# Altium PCB VDT.PcbDoc
Units mm, origin at the board's own origin, x right, y up, seen from the top; angles counter-clockwise.
Board outline 200 x 80 mm, 2 copper layers (Top Layer, Bottom Layer); 28 components, 31 nets, 153 pads, 600 vias.
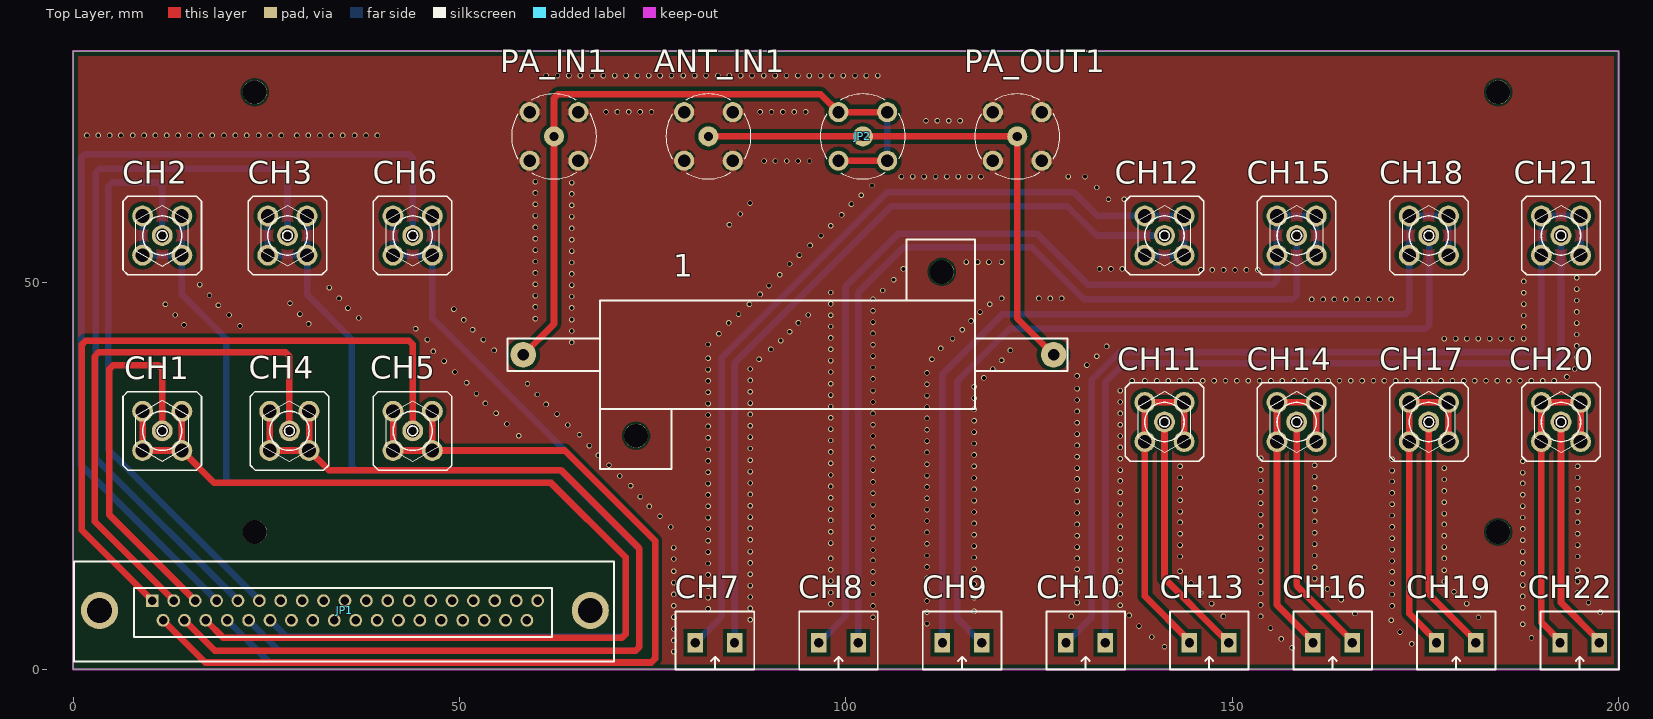
[diagram p0: Top Layer view]
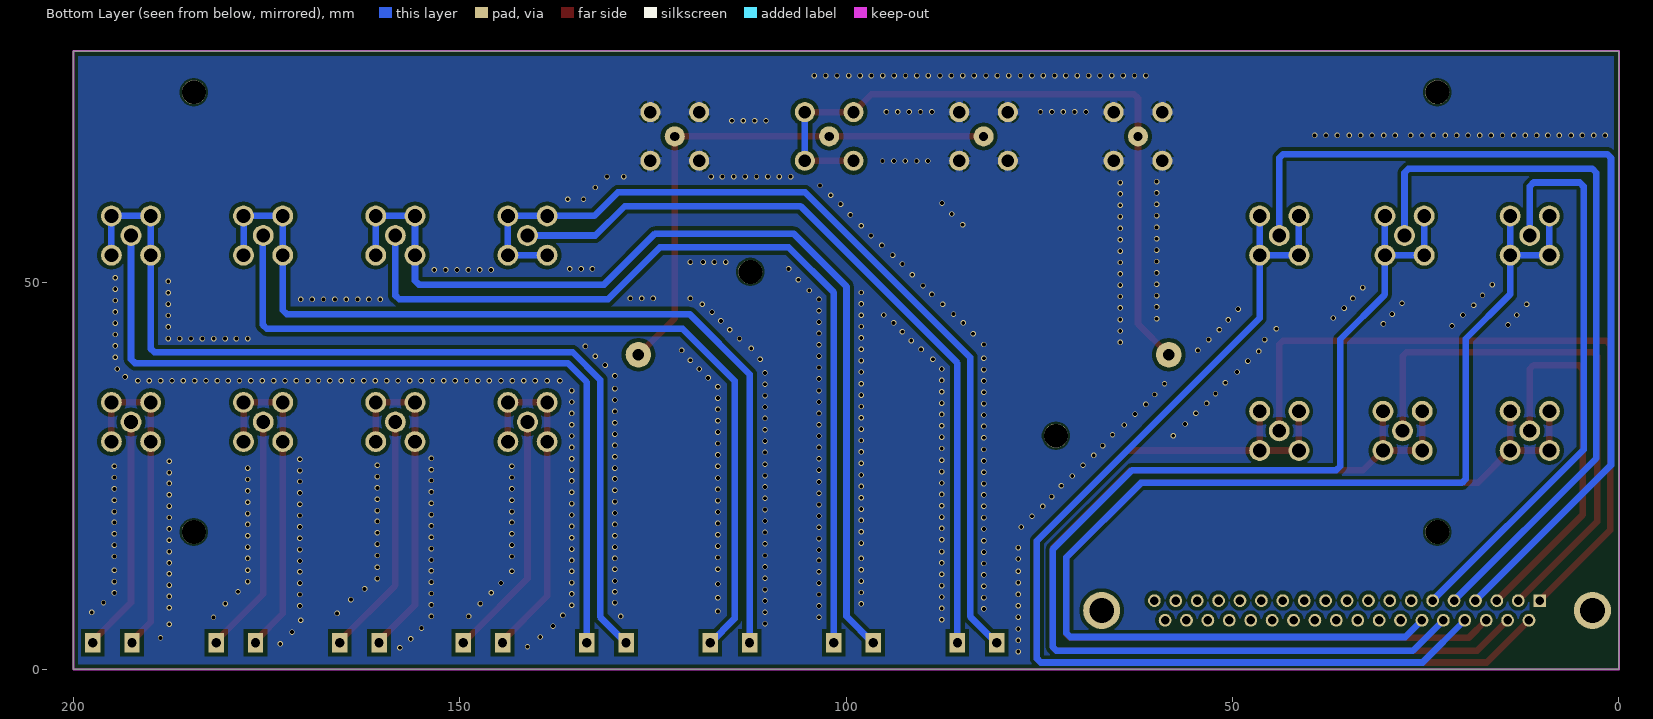
[diagram p1: Bottom Layer view, seen from below]

## Layer stack, top to bottom
Top Solder: solder mask 0.0102, Solder Resist, Dk 3.5
Top Layer: signal copper 0.0356
Dielectric 1: dielectric 0.32, FR-4, Dk 4.8
Bottom Layer: signal copper 0.0356
Bottom Solder: solder mask 0.0102, Solder Resist, Dk 3.5

## Board outline
0,0 0,80 200,80 200,0

## Design rules (kind name [scope] priority, off if disabled: settings)
Clearance [All] p1: gap=0.254 ignorepadtopadclearanceinfootprint=FALSE except(0.5: Arc-Fill Arc-Poly Arc-Region Track-Fill Track-Poly Track-Region SMDPad-Fill SMDPad-Poly SMDPad-Region THPad-Fill THPad-Poly THPad-Region Via-Fill Via-Poly Via-Region Fill-Fill Fill-Poly Fill-Region Poly-Poly Poly-Region Region-Region)
PlaneClearance [All] p1: clearance=2
PlaneConnect [All] p1: planeconnectstyle=Relief reliefexpansion=0.508 reliefentries=4 reliefconductorwidth=0.4 reliefairgap=0.254
PolygonConnect [All] p1: connectstyle=Relief reliefconductorwidth=1 reliefentries=4 polygonreliefangle="90 Angle" airgapwidth=0.254
RoutingVias [All] p1: holewidth=0.711 width=1.27 viastyle="Through Hole" minholewidth=0.711 minwidth=1.27 maxholewidth=0.711 maxwidth=1.27
SolderMaskExpansion [All] p1: expansion=0.102 istentingtop=FALSE
Width [All] p1: maxlimit=0.854 minlimit=0.254 preferedwidth=0.554
28 further rules are at their usual default settings.

## Classes and differential pairs
component class VDT: 1 ch1 CH9 CH15 CH21 JP1 JP2 PA_IN1 PA_OUT1

## Components (designator, comment, footprint, x,y, rotation, side; value= is the part's Value field where it differs from the comment)
1 "0.5R 50W 5%" HS50_P_RES 128.702,55.575 r180 top (schematic designator R1)
ANT_IN1 "BNC_KE" BNC-KE 82.211,68.961 r0 top (schematic designator JP26)
CH1 "SMA_KWE_FM" SMA-KWE 11.532,30.861 r0 top (schematic designator JP3)
CH2 "SMA_KWE_FM" SMA-KWE 11.532,56.134 r180 top (schematic designator JP6)
CH3 "SMA_KWE_FM" SMA-KWE 27.737,56.134 r0 top (schematic designator JP5)
CH4 "SMA_KWE_FM" SMA-KWE 27.991,30.861 r180 top (schematic designator JP2)
CH5 "SMA_KWE_FM" SMA-KWE 43.942,30.861 r180 top (schematic designator JP1)
CH6 "SMA_KWE_FM" SMA-KWE 43.942,56.134 r0 top (schematic designator JP4)
CH7 "TERMINAL_5MM_2P" TERMINAL_5MM_2P 83.058,3.429 r180 top (schematic designator JP23)
CH8 "TERMINAL_5MM_2P" TERMINAL_5MM_2P 99.042,3.429 r180 top (schematic designator JP22)
CH9 "TERMINAL_5MM_2P" TERMINAL_5MM_2P 115.026,3.429 r180 top (schematic designator JP21)
CH10 "TERMINAL_5MM_2P" TERMINAL_5MM_2P 131.01,3.429 r180 top (schematic designator JP20)
CH11 "SMA_KWE_FM" SMA-KWE 141.224,32.004 r0 top (schematic designator JP11)
CH12 "SMA_KWE_FM" SMA-KWE 141.224,56.134 r0 top (schematic designator JP15)
CH13 "TERMINAL_5MM_2P" TERMINAL_5MM_2P 146.993,3.429 r180 top (schematic designator JP19)
CH14 "SMA_KWE_FM" SMA-KWE 158.327,32.004 r0 top (schematic designator JP10)
CH15 "SMA_KWE_FM" SMA-KWE 158.327,56.134 r0 top (schematic designator JP14)
CH16 "TERMINAL_5MM_2P" TERMINAL_5MM_2P 162.977,3.429 r180 top (schematic designator JP18)
CH17 "SMA_KWE_FM" SMA-KWE 175.429,32.004 r0 top (schematic designator JP9)
CH18 "SMA_KWE_FM" SMA-KWE 175.429,56.134 r0 top (schematic designator JP13)
CH19 "TERMINAL_5MM_2P" TERMINAL_5MM_2P 178.961,3.429 r180 top (schematic designator JP17)
CH20 "SMA_KWE_FM" SMA-KWE 192.532,32.004 r0 top (schematic designator JP8)
CH21 "SMA_KWE_FM" SMA-KWE 192.532,56.134 r0 top (schematic designator JP12)
CH22 "TERMINAL_5MM_2P" TERMINAL_5MM_2P 194.945,3.429 r180 top (schematic designator JP16)
JP1 "DB37_M" DB37 3.429,7.62 r0 top (schematic designator JP7)
JP2 "BNC_KE" BNC-KE 102.193,68.961 r0 top (schematic designator JP25)
PA_IN1 "BNC_KE" BNC-KE 62.23,68.961 r0 top (schematic designator JP27)
PA_OUT1 "BNC_KE" BNC-KE 122.174,68.961 r0 top (schematic designator JP24)

## Footprints (in the part's own frame and the unit in brackets; to place one, negate y for a bottom-side part, rotate by r counter-clockwise, add the part's x,y. Pads: shape width x height; smd on the part's side, far side on the other; paste and mask are expansions set on the pad)
BNC-KE [mm]
  round 2.6 hole 1.2: 1(0,0)
  round 2.6 hole 1.6: 2(-3.15,3.15) 3(3.15,3.15) 4(3.15,-3.15) 5(-3.15,-3.15)
  silkscreen extent -5.5,-5.5 5.5,5.5, body extent -5.5,-5.5 5.5,5.5, height 13.9
DB37 [mm]
  rect 1.65x1.65 / inner round 1.524 / far side rect 1.65x1.65 hole 1.1: 1(6.82,1.27)
  round 1.65 hole 1.1: 2(9.59,1.27) 3(12.36,1.27) 4(15.13,1.27) 5(17.9,1.27) 6(20.67,1.27) 7(23.44,1.27) 8(26.21,1.27) 9(28.98,1.27) 10(31.75,1.27) 11(34.52,1.27) 12(37.29,1.27) 13(40.06,1.27) 14(42.83,1.27) 15(45.6,1.27) 16(48.37,1.27) 17(51.14,1.27) 18(53.91,1.27) 19(56.68,1.27) 20(8.205,-1.27) 21(10.975,-1.27) 22(13.745,-1.27) 23(16.515,-1.27) 24(19.285,-1.27) 25(22.055,-1.27) 26(24.825,-1.27) 27(27.595,-1.27) 28(30.365,-1.27) 29(33.135,-1.27) 30(35.905,-1.27) 31(38.675,-1.27) 32(41.445,-1.27) 33(44.215,-1.27) 34(46.985,-1.27) 35(49.755,-1.27) 36(52.525,-1.27) 37(55.295,-1.27)
  round 4.8 hole 3.2: 38(0,0) 39(63.5,0)
  silkscreen extent -3.3,-6.6 66.55,6.35, body extent -3.11,-6.33 66.29,6.22, height 13.4
HS50_P_RES [mm]
  round 3.3 hole 1.5: 1(1.829,14.859) 2(70.46,14.859)
  round 3.1 hole 3.1: ""(16.307,4.14) ""(55.855,25.349)
  silkscreen extent 0.05,-0.05 72.49,29.67, body extent 0,-0.02 72.5,29.68, height 15.8
SMA-KWE [mm]
  round 2.7 hole 1.778: 1(0,0) 2(2.54,-2.54) 3(2.54,2.54) 4(-2.54,2.54) 5(-2.54,-2.54)
  silkscreen extent -5.08,-5.08 5.08,5.08, body extent -3.51,-3.46 3.49,3.54, height 9.79
TERMINAL_5MM_2P [mm]
  rect 2x2.5 hole 1.2: 1(-2.54,0) 2(2.54,0)
  silkscreen extent -5.08,-4.08 5.08,3.43, body extent -5,-4.07 5,3.43, height 10

## Part data
1: library part RHS50_50W_0.5R, "500 mOhms ±5% 50W Wirewound Chassis Mount Resistor", Manufacture Part Number=HSA50R50J, Manufacturer="TE Connectivity Passive Product", Link=https://www.digikey.cn/en/products/detail/te-connectivity-passive-product/HSA50R50J/2366456, Packaging="Cut Tape (CT)", Price=$5.78, Viet Nam Link=https://linhkienchatluong.vn/dien-tro-nhom-50w/dien-tro-nhom-50w-05r-5-rx24-50w05r_sp478_ct3334.aspx
ANT_IN1 JP2 PA_IN1 PA_OUT1: "BNC Connector Jack, Female Socket 50 Ohms Through Hole Solder", Manufacture Part Number=CONBNC001, Manufacturer="TE Connectivity Linx", Link=https://www.digikey.cn/en/products/detail/te-connectivity-linx/CONBNC001/16013844, Packaging=Tray, Price=$1.84, Viet Nam Link=https://linhkien888.vn/dau-bnc-ke-female-han-mach
CH1 CH2 CH3 CH4 CH5 CH6 CH11 CH12 CH14 CH15 CH17 CH18 CH20 CH21: "SMA Connector Jack, Female Socket 50 Ohms Through Hole Solder", Manufacture Part Number=RF2-04A-T-00-50-G, Manufacturer="Adam Tech", Link=https://www.digikey.cn/en/products/detail/adam-tech/RF2-04A-T-00-50-G/9830588, Packaging=Bulk, Price=$2.20, Viet Nam Link=https://linhkienchatluong.vn/de-anten/de-anten-sma-5-chan-cai-thang-sma-ke_sp1035_ct8354.aspx
CH7 CH8 CH9 CH10 CH13 CH16 CH19 CH22: "2 Position Wire to Board Terminal Block Horizontal with Board 0.197\" (5.00mm) Through Hole", Manufacture Part Number=691137710002, Manufacturer="Würth Elektronik", Link=https://www.digikey.cn/en/products/detail/w%C3%BCrth-elektronik/691137710002/6644051, Packaging=Bulk, Price=$0.41, Viet Nam Link=https://linhkienchatluong.vn/cau-dau-kf127/cau-dau-2p-kf127-508mm-mau-xanh-chinh-hang-meigan_sp868_ct4100.aspx
JP1: "37 Position D-Sub Plug, Male Pins Connector", Manufacture Part Number=2301836-1, Manufacturer="TE Connectivity AMP Connectors", Link=https://www.digikey.cn/en/products/detail/te-connectivity-amp-connectors/2301836-1/7776540, Packaging=Tray, Price=$5.80, Viet Nam Link=https://linhkien.cxt.vn/6261-db37-cong-duc-37p-chan-thang-2-hang-han-pcb.html

## Free pads (board coordinates)
  round 3.1 hole 3.1: 2(23.495,17.78) 2(23.495,74.676) 3(184.404,17.78) 3(184.404,74.676)

## Via types
v1: diameter 0.7, hole 0.5, Top Layer to Bottom Layer, tented both sides, 600 vias

## Nets (pads, with @x,y where several pads share a name; then routed paths per layer and width w, separated by ;. In a path a pad name is that pad's centre, name@x,y a point inside that pad or via, vN(x,y) a via of type N, cw(c..) or ccw(c..) an arc to the next point about the centre after c; other vN are vias at no path point)
A00: CH5.1 JP1.1 | length 91.3
  Top Layer w0.854: JP1.1 1.143,17.996 1.143,42.045 1.643,42.545 43.442,42.545 43.942,42.045 CH5.1
A01: CH4.1 JP1.2 | length 71.1
  Top Layer w0.854: JP1.2 2.794,19.115 2.794,40.521 3.294,41.021 27.491,41.021 27.991,40.521 CH4.1
A02: CH1.1 JP1.3 | length 49.8
  Top Layer w0.854: CH1.1 11.532,38.87 11.031,39.37 5.199,39.37 4.699,38.87 4.699,19.98 JP1.3
A03: CH6.1 JP1.4 | length 117.9
  Bottom Layer w0.854: JP1.4 1.016,26.433 1.016,66.175 1.516,66.675 43.442,66.675 43.942,66.175 CH6.1
A04: CH3.1 JP1.5 | length 96.4
  Bottom Layer w0.854: JP1.5 2.921,27.298 2.921,64.27 3.421,64.77 27.237,64.77 27.737,64.27 CH3.1
A05: CH2.1 JP1.6 | length 75.4
  Bottom Layer w0.854: CH2.1 11.532,62.492 11.031,62.992 5.072,62.992 4.572,62.492 4.572,28.417 JP1.6
BNC1_IN: 1.1 ANT_IN1.1 JP2.1 PA_OUT1.1 | length 70.2
  Top Layer w0.854: ANT_IN1.1 JP2.1 PA_OUT1.1 122.174,45.415 1.1
BNC2_IN: 1.2 JP2.2 JP2.3 JP2.4 JP2.5 PA_IN1.1 | length 91.7
  Top Layer w0.854: 1.2 62.23,44.704 PA_IN1.1 62.23,73.922 62.73,74.422 96.732,74.422 JP2.2 JP2.3 ; JP2.5 JP2.4
  Bottom Layer w0.854: JP2.4 JP2.3
COM_A00: CH5.2 CH5.3 CH5.4 CH5.5 JP1.20 | length 130.3
  Top Layer w0.854: JP1.20 17.095,0.889 74.811,0.889 75.311,1.389 75.311,16.637 63.627,28.321 CH5.4 ; CH5.2 CH5.3 CH5.4 ; CH5.5 CH5.4
COM_A01: CH4.2 CH4.3 CH4.4 CH4.5 JP1.21 | length 136.7
  Top Layer w0.854: JP1.21 18.341,2.413 72.779,2.413 73.279,2.913 73.279,15.621 63.119,25.781 33.071,25.781 CH4.4 ; CH4.2 CH4.3 CH4.4 ; CH4.5 CH4.4
COM_A02: CH1.2 CH1.3 CH1.4 CH1.5 JP1.22 | length 143.8
  Top Layer w0.854: CH1.4 CH1.5 CH1.2 ; CH1.3 CH1.2 ; JP1.22 19.46,4.064 71.001,4.064 71.501,4.564 71.501,14.478 61.849,24.13 18.263,24.13 CH1.2
COM_A03: CH6.2 CH6.3 CH6.4 CH6.5 JP1.23 | length 137.2
  Bottom Layer w0.854: JP1.23 25.405,0.889 74.811,0.889 75.311,1.389 75.311,16.637 46.482,45.466 CH6.2 ; CH6.4 CH6.5 CH6.2 ; CH6.3 CH6.2
COM_A04: CH3.2 CH3.3 CH3.4 CH3.5 JP1.24 | length 151.6
  Bottom Layer w0.854: JP1.24 26.651,2.413 72.779,2.413 73.279,2.913 73.279,15.494 62.992,25.781 36.568,25.781 36.068,26.281 36.068,42.723 30.277,48.514 CH3.2 ; CH3.4 CH3.5 CH3.2 ; CH3.3 CH3.2
COM_A05: CH2.2 CH2.3 CH2.4 CH2.5 JP1.25 | length 159.4
  Bottom Layer w0.854: CH2.2 CH2.3 CH2.4 ; CH2.5 CH2.4 ; JP1.25 27.643,4.191 71.001,4.191 71.501,4.691 71.501,14.478 61.849,24.13 20.312,24.13 19.812,24.63 19.812,42.774 14.072,48.514 CH2.4
GND: ANT_IN1.2 ANT_IN1.3 ANT_IN1.4 ANT_IN1.5 PA_IN1.2 PA_IN1.3 PA_IN1.4 PA_IN1.5 PA_OUT1.2 PA_OUT1.3 PA_OUT1.4 PA_OUT1.5
  other v1: 77.724,2.286 157.734,2.794 141.224,2.921 173.228,3.302 77.724,3.756 156.337,3.937 188.722,4.064 139.573,4.191 171.704,4.826 77.724,5.225 154.94,5.334 137.922,5.588 187.579,5.842 110.49,5.915 170.561,6.35 87.63,6.423 181.864,6.731 77.724,6.767 103.505,6.749 129.159,6.858 148.844,6.858 153.67,6.858 136.652,6.985 165.862,7.239 197.612,7.366 110.49,7.384 116.586,7.493 82.169,7.82 87.63,7.892 187.579,7.965 77.724,8.237 103.505,8.219 170.688,8.219 135.509,8.291 153.67,8.346 98.044,8.473 147.32,8.509 180.34,8.509 129.921,8.636 196.088,8.636 110.49,8.854 164.084,9.017 116.586,9.271 82.169,9.289 87.63,9.362 187.579,9.434 103.505,9.688 170.688,9.688 77.724,9.706 135.509,9.761 153.67,9.815 194.691,9.888 145.923,9.906 98.044,9.942 129.921,10.033 178.689,10.033 110.49,10.323 162.306,10.414 82.169,10.759 87.63,10.831 187.579,10.904 116.586,11.049 103.505,11.158 170.688,11.158 144.653,11.176 77.724,11.23 135.509,11.23 153.67,11.285 177.419,11.357 194.691,11.357 98.044,11.412 129.921,11.43 160.655,11.738 110.49,11.793 82.169,12.228 87.63,12.301 187.579,12.373 103.505,12.627 170.688,12.627 77.724,12.7 135.509,12.7 143.256,12.7 153.67,12.754 177.419,12.827 194.691,12.827 98.044,12.881 116.586,12.954 129.921,12.954 160.655,13.208 110.49,13.262 82.169,13.698 87.63,13.77 187.579,13.77 170.688,14.024 103.505,14.097 135.509,14.097 153.67,14.151 77.724,14.278 98.044,14.351 129.921,14.351 177.419,14.351 116.586,14.478 143.256,14.605 194.691,14.605 110.49,14.732 160.655,14.732 82.169,15.167 87.63,15.24 187.579,15.24 103.505,15.44 170.688,15.494 135.509,15.567 153.67,15.621 77.724,15.748 129.921,15.821 177.419,15.821 116.586,15.948 143.256,16.075 194.691,16.075 160.655,16.202 110.49,16.256 98.044,16.329 82.169,16.637 187.579,16.71 87.63,16.764 103.505,16.909 170.688,16.964 135.509,17.036 153.67,17.091 129.921,17.29 177.419,17.29 116.586,17.417 143.256,17.544 194.691,17.544 160.655,17.671 110.49,17.726 98.044,17.798 82.169,18.161 187.579,18.179 87.63,18.234 103.505,18.379 77.343,18.415 170.688,18.433 135.509,18.506 153.67,18.56 129.921,18.76 177.419,18.76 116.586,18.887 143.256,19.014 194.691,19.014 160.655,19.141 110.49,19.195 98.044,19.268 82.169,19.631 187.579,19.649 87.63,19.703 75.946,19.812 103.505,19.848 170.688,19.903 135.509,19.975 153.67,20.03 177.419,20.157 129.921,20.229 116.586,20.356 143.256,20.411 194.691,20.411 160.655,20.538 110.49,20.665 98.044,20.737 74.549,21.082 82.169,21.1 187.579,21.118 87.63,21.173 103.505,21.318 170.688,21.372 135.509,21.445 153.67,21.499 177.419,21.626 129.921,21.699 116.586,21.826 143.256,21.88 194.691,21.88 160.655,22.007 110.49,22.134 98.044,22.207 73.406,22.352 82.169,22.57 187.579,22.588 87.63,22.642 103.505,22.787 170.688,22.842 135.509,22.914 153.67,22.969 177.419,23.096 129.921,23.168 116.586,23.295 143.256,23.35 194.691,23.35 160.655,23.477 110.49,23.604 98.044,23.676 72.136,23.749 82.169,24.039 187.579,24.057 87.63,24.112 103.505,24.257 170.688,24.311 135.509,24.384 153.67,24.438 177.419,24.565 129.921,24.638 116.586,24.765 143.256,24.819 194.691,24.819 160.655,24.946 70.739,25.019 110.49,25.073 98.044,25.146 187.579,25.454 82.169,25.509 87.63,25.581 170.688,25.708 103.505,25.781 135.509,25.781 153.67,25.835 129.921,26.035 177.419,26.035 116.586,26.289 143.256,26.289 194.691,26.289 69.342,26.416 160.655,26.416 110.49,26.543 98.044,26.67 187.579,26.924 82.169,26.978 87.63,27.051 170.688,27.178 103.505,27.251 135.509,27.251 153.67,27.305 129.921,27.505 67.945,27.686 116.586,27.759 110.49,28.067 98.044,28.14 82.169,28.448 87.63,28.575 103.505,28.72 135.509,28.72 66.802,28.956 129.921,28.974 116.586,29.228 110.49,29.537 98.044,29.609 82.169,29.972 87.63,30.045 103.505,30.19 135.509,30.19 57.658,30.226 65.532,30.353 129.921,30.444 116.586,30.698 110.49,31.006 98.044,31.079 82.169,31.442 87.63,31.514 64.008,31.623 103.505,31.659 135.509,31.659 56.134,31.75 129.921,31.913 116.586,32.167 110.49,32.476 98.044,32.548 82.169,32.911 87.63,32.984 62.611,33.02 103.505,33.129 135.509,33.129 54.737,33.147 129.921,33.383 116.586,33.637 110.49,33.945 98.044,34.018 61.214,34.29 82.169,34.381 53.34,34.417 87.63,34.453 103.505,34.598 135.509,34.598 129.921,34.852 116.586,35.106 110.49,35.415 98.044,35.487 60.071,35.56 52.197,35.687 82.169,35.85 87.63,35.923 103.505,36.068 135.509,36.068 129.921,36.322 116.586,36.576 110.49,36.884 58.801,36.957 98.044,36.957 50.927,37.084 82.169,37.32 137.033,37.338 138.684,37.338 140.244,37.338 141.714,37.338 143.183,37.338 144.653,37.338 146.177,37.338 147.647,37.338 149.116,37.338 150.586,37.338 152.055,37.338 153.525,37.338 154.994,37.338 156.464,37.338 157.988,37.338 159.458,37.338 160.927,37.338 162.397,37.338 163.866,37.338 165.336,37.338 166.805,37.338 168.275,37.338 169.672,37.338 171.142,37.338 172.611,37.338 174.081,37.338 175.55,37.338 177.02,37.338 178.489,37.338 179.959,37.338 181.356,37.338 182.826,37.338 184.295,37.338 185.765,37.338 187.234,37.338 188.704,37.338 190.173,37.338 191.643,37.338 87.63,37.392 103.505,37.592 117.856,37.719 193.294,37.846 129.921,37.973 110.49,38.354 49.403,38.481 98.044,38.481 82.169,38.789 87.63,38.862 118.999,38.862 194.31,38.862 103.505,39.062 131.191,39.37 48.006,39.878 98.044,39.951 120.142,40.005 88.773,40.132 111.125,40.132 82.169,40.259 194.564,40.386 132.461,40.513 103.505,40.531 46.609,41.148 54.483,41.275 121.285,41.275 90.297,41.402 98.044,41.42 112.268,41.529 133.731,41.783 194.564,41.856 103.505,42.001 82.169,42.037 64.516,42.309 91.567,42.545 45.847,42.672 53.086,42.672 113.792,42.799 177.419,42.799 178.889,42.799 180.358,42.799 181.828,42.799 183.297,42.799 184.767,42.799 186.236,42.799 187.706,42.799 98.044,42.89 194.564,43.325 83.566,43.434 103.505,43.47 92.71,43.688 64.516,43.779 51.689,43.942 115.062,43.942 44.323,44.069 187.706,44.323 98.044,44.359 21.59,44.45 14.351,44.577 30.48,44.704 194.564,44.795 84.836,44.831 93.853,44.831 103.505,44.94 116.205,45.085 50.546,45.212 64.516,45.248 59.817,45.375 36.957,45.466 187.706,45.793 98.044,45.829 13.208,45.847 20.193,45.847 95.123,45.847 29.337,45.974 86.106,45.974 117.348,46.228 194.564,46.264 103.505,46.409 49.276,46.609 35.56,46.736 64.516,46.772 59.817,46.899 18.796,47.117 11.938,47.244 87.503,47.244 118.618,47.244 187.706,47.262 98.044,47.298 28.067,47.371 194.564,47.734 103.505,47.879 160.274,47.879 161.744,47.879 163.213,47.879 164.683,47.879 166.152,47.879 167.622,47.879 169.091,47.879 170.561,47.879 34.417,48.006 120.142,48.006 124.968,48.006 126.438,48.006 127.907,48.006 64.516,48.242 59.817,48.369 17.653,48.387 88.9,48.514 187.706,48.732 98.044,48.768 104.775,49.022 194.564,49.203 33.147,49.403 90.043,49.657 64.516,49.711 16.383,49.784 59.817,49.838 187.706,50.201 106.172,50.419 194.564,50.673 91.44,51.054 64.516,51.181 59.817,51.308 145.941,51.689 147.411,51.689 148.88,51.689 150.35,51.689 151.819,51.689 153.289,51.689 107.442,51.816 132.824,51.816 134.293,51.816 135.763,51.816 92.71,52.451 64.516,52.651 115.57,52.705 117.04,52.705 118.509,52.705 120.142,52.705 59.817,52.778 93.98,53.594 64.516,54.12 59.817,54.247 95.377,54.864 64.516,55.59 59.817,55.717 96.774,56.134 64.516,57.059 59.817,57.186 98.044,57.404 84.927,57.531 64.516,58.583 59.817,58.71 99.441,58.801 86.324,58.928 64.516,60.053 59.817,60.18 100.711,60.198 87.594,60.325 133.985,60.833 136.017,60.833 101.981,61.341 64.516,61.522 59.817,61.649 132.461,62.357 103.378,62.611 64.516,62.992 59.817,63.119 107.188,63.754 108.658,63.754 110.127,63.754 111.597,63.754 113.066,63.754 114.536,63.754 116.005,63.754 117.475,63.754 128.778,63.754 130.937,63.754 89.408,65.786 90.878,65.786 92.347,65.786 93.817,65.786 95.286,65.786 1.778,69.088 3.248,69.088 4.717,69.088 6.187,69.088 7.711,69.088 9.18,69.088 10.65,69.088 12.119,69.088 13.589,69.088 15.059,69.088 16.528,69.088 17.998,69.088 19.522,69.088 20.991,69.088 22.461,69.088 24.003,69.088 25.473,69.088 26.942,69.088 28.956,69.088 30.426,69.088 31.95,69.088 33.419,69.088 34.889,69.088 36.431,69.088 37.9,69.088 39.37,69.088 110.363,70.993 111.833,70.993 113.302,70.993 114.772,70.993 68.961,72.136 70.431,72.136 71.9,72.136 73.37,72.136 74.839,72.136 88.9,72.136 90.37,72.136 91.839,72.136 93.309,72.136 94.778,72.136 61.214,76.835 62.684,76.835 64.153,76.835 65.623,76.835 67.147,76.835 68.616,76.835 70.086,76.835 71.555,76.835 73.025,76.835 74.495,76.835 75.964,76.835 77.434,76.835 78.958,76.835 80.427,76.835 81.897,76.835 83.439,76.835 84.909,76.835 86.378,76.835 87.848,76.835 89.372,76.835 90.841,76.835 92.311,76.835 93.78,76.835 95.25,76.835 96.72,76.835 98.189,76.835 99.659,76.835 101.183,76.835 102.652,76.835 104.122,76.835
NetJP8_1: CH20.1 CH22.1 | length 30.6
  Top Layer w0.854: CH20.1 192.532,8.632 197.485,3.679 CH22.1
NetJP8_2: CH20.2 CH20.3 CH20.4 CH20.5 CH22.2 | length 42.3
  Top Layer w0.854: CH22.2 192.405,3.679 189.992,6.092 CH20.5 CH20.4 CH20.3 CH20.2
NetJP9_1: CH17.1 CH19.1 | length 31.1
  Top Layer w0.854: CH17.1 175.429,9.751 181.501,3.679 CH19.1
NetJP9_2: CH17.2 CH17.3 CH17.4 CH17.5 CH19.2 | length 42.7
  Top Layer w0.854: CH19.2 176.421,3.679 172.889,7.211 CH17.5 CH17.4 CH17.3 CH17.2
NetJP10_1: CH14.1 CH16.1 | length 31.6
  Top Layer w0.854: CH14.1 158.327,10.87 165.517,3.679 CH16.1
NetJP10_2: CH14.2 CH14.3 CH14.4 CH14.5 CH16.2 | length 43.2
  Top Layer w0.854: CH16.2 160.437,3.679 155.787,8.33 CH14.5 CH14.4 CH14.3 CH14.2
NetJP11_1: CH11.1 CH13.1 | length 32.2
  Top Layer w0.854: CH11.1 141.224,11.738 148.71,4.252 148.96,4.252 149.533,3.679 CH13.1
NetJP11_2: CH11.2 CH11.3 CH11.4 CH11.5 CH13.2 | length 43.7
  Top Layer w0.854: CH11.2 CH11.3 CH11.4 CH11.5 138.684,9.448 144.453,3.679 CH13.2
NetJP12_1: CH10.1 CH21.1 | length 110
  Bottom Layer w0.854: CH10.1 133.55,37.164 136.009,39.624 192.032,39.624 192.532,40.124 CH21.1
NetJP12_2: CH10.2 CH21.2 CH21.3 CH21.4 CH21.5 | length 121.7
  Bottom Layer w0.854: CH10.2 131.826,6.785 131.826,37.465 135.382,41.021 189.492,41.021 189.992,41.521 CH21.5@189.992,52.705 ; CH21.5 CH21.4 CH21.3 CH21.2
NetJP13_1: CH9.1 CH18.1 | length 110.8
  Bottom Layer w0.854: CH9.1 114.427,6.568 114.427,37.338 121.158,44.069 174.971,44.069 175.472,44.569 175.472,56.092 CH18.1
NetJP13_2: CH9.2 CH18.2 CH18.3 CH18.4 CH18.5 | length 121
  Bottom Layer w0.854: CH9.2 112.486,38.191 120.269,45.974 172.389,45.974 172.889,46.474 CH18.5 CH18.4 CH18.3 CH18.2
NetJP14_1: CH8.1 CH15.1 | length 115.2
  Bottom Layer w0.854: CH8.1 101.582,48.75 107.442,54.61 124.079,54.61 130.81,47.879 157.826,47.879 158.327,48.379 CH15.1
NetJP14_2: CH8.2 CH15.2 CH15.3 CH15.4 CH15.5 | length 127.7
  Bottom Layer w0.854: CH8.2 99.949,6.876 99.949,49.53 106.807,56.388 124.714,56.388 131.318,49.784 155.286,49.784 155.787,50.284 CH15.5 CH15.4 CH15.3 CH15.2
NetJP15_1: CH7.1 CH12.1 | length 101.8
  Bottom Layer w0.854: CH7.1 85.598,39.624 105.918,59.944 128.651,59.944 128.651,59.936 132.453,56.134 CH12.1
NetJP15_2: CH7.2 CH12.2 CH12.3 CH12.4 CH12.5 | length 118.5
  Bottom Layer w0.854: CH7.2 83.947,6.858 83.947,40.386 105.283,61.722 129.54,61.722 132.588,58.674 CH12.4 CH12.3 CH12.2 CH12.5
pads on no net: 1. JP1.7 JP1.8 JP1.9 JP1.10 JP1.11 JP1.12 JP1.13 JP1.14 JP1.15 JP1.16 JP1.17 JP1.18 JP1.19 JP1.26 JP1.27 JP1.28 JP1.29 JP1.30 JP1.31 JP1.32 JP1.33 JP1.34 JP1.35 JP1.36 JP1.37 JP1.38 JP1.39

## Polygon pours and split planes (outlines as drawn)
GND on Bottom Layer "GND_L02_P002" (solid, remove dead copper, pour order 2): 0,79.883 200.025,79.883 200.025,-0.127 0,-0.127
GND on Bottom Layer "GND_L02_P000" (solid, pour order 0): 56.769,74.422 127.635,74.422 127.635,63.373 56.769,63.373
GND on Top Layer "GND_L01_P001" (solid, remove dead copper, pour order 1): 0,80.01 200.025,80.01 200.025,0 0,0

## Keep-outs
Keep-Out Layer:
  the board outline again, w0.254